# EAGLE board Part 1 – Build the Minimized Circuit_ y = a'bd' + bc + bd' (EAGLE 9.7.0)

Size 148.5 x 126.87 mm. Coordinates in mm from the lower left corner, seen from the top.
Outline: 0,0 148.5,0 148.5,126.87 0,126.87 0,0
Copper layers (1*16): Top 0.035mm / dielectric 1.5mm / Bottom 0.035mm
Design rules "default": minimum track width 6mil, minimum drill 0.35mm, track to track 6mil, track to pad 6mil, pad to pad 6mil, via to via 6mil, smd to smd 6mil, copper to edge 40mil, drill to drill 6mil, minimum pad ring 10mil, minimum via ring 8mil, stop-mask expansion 4mil, vias tented up to drill 0mil, thermal gap 10mil

## Footprints (pad centres in the part's own frame; a part is rotated, then mirrored left to right if it is on the bottom)
LEDRD254W60D565H860B = drill 0.981 pad 1.581: 1 -1.27,0; 2 1.27,0
BATTERY-GENERIC = drill 1.118 pad 3.15 octagon: + 2.54,0; - -2.54,0
RESAD1016W63L850D250B = drill 0.83 pad 1.43: 1 -5.08,0; 2 5.08,0
SWITCH-SPDT-PTH-8.5X3.7MM = drill 1.016 pad 1.88: 1 -2.54,0; 2 0,0; 3 2.54,0
DIP762W53P254L1969H508Q14B = drill 0.743 pad 1.343: 1 -3.81,7.62; 2 -3.81,5.08; 3 -3.81,2.54; 4 -3.81,0; 5 -3.81,-2.54; 6 -3.81,-5.08; 7 -3.81,-7.62; 8 3.81,-7.62; 9 3.81,-5.08; 10 3.81,-2.54; 11 3.81,0; 12 3.81,2.54; 13 3.81,5.08; 14 3.81,7.62

## Placement (x,y rotation side)
D1  RED  [LEDRD254W60D565H860B]  76.22,21.67 180 top
P1  BATTERYGENERIC  [BATTERY-GENERIC]  8.26,118.61 180 top
R1  220  [RESAD1016W63L850D250B]  74.95,8.97 90 top
S1  TOGGLE  [SWITCH-SPDT-PTH-8.5X3.7MM]  13.99,19.13 0 top
S3  TOGGLE  [SWITCH-SPDT-PTH-8.5X3.7MM]  102.89,19.13 0 top
S5  TOGGLE  [SWITCH-SPDT-PTH-8.5X3.7MM]  54.63,19.13 0 top
S7  TOGGLE  [SWITCH-SPDT-PTH-8.5X3.7MM]  138.45,19.13 0 top
U1  74HC04_PDIP  [DIP762W53P254L1969H508Q14B]  29.44,84.65 90 top
U2  74HC08_PDIP  [DIP762W53P254L1969H508Q14B]  80.24,84.65 90 top
U3  74HC32_PDIP  [DIP762W53P254L1969H508Q14B]  133.58,84.65 90 top

## Library data of the parts
D1 = Tinkercad; CATEGORY: Opto-Electronic; SUB-CATEGORY: LED; VALUE: LED_RED
P1 R1 S1 S3 S5 S7 U1-U3 = Tinkercad

## Nets
D1_C: D1.2 R1.2
P1+: P1.+ S1.3 S3.3 S5.3 S7.3 U1.14 U2.14 U3.14
P1-: P1.- R1.1 S1.1 S3.1 S5.1 S7.1 U1.7 U2.7 U3.7
U1_1A: S1.2 U1.1
U1_1Y: U1.2 U2.1
U1_2A: S7.2 U1.3 U2.9
U1_2Y: U1.4 U2.5
U1_3Y: U1.6 U2.10
U2_1Y: U2.3 U3.1
U2_2A: S5.2 U1.5 U2.4 U2.13
U2_2Y: U2.2 U2.6
U2_3Y: U2.8 U3.5
U2_4A: S3.2 U2.12
U2_4Y: U2.11 U3.2
U3_1Y: U3.3 U3.4
U3_2Y: D1.1 U3.6

## Tracks (layer width: path | path; a pad name or v marks a point on that pad's centre or on a via)
D1_C  (1 unrouted)
P1+  (7 unrouted)
P1-  (8 unrouted)
U1_1A  (1 unrouted)
U1_1Y  (1 unrouted)
U1_2A  (2 unrouted)
U1_2Y  (1 unrouted)
U1_3Y  (1 unrouted)
U2_1Y  (1 unrouted)
U2_2A  (3 unrouted)
U2_2Y  (1 unrouted)
U2_3Y  (1 unrouted)
U2_4A  (1 unrouted)
U2_4Y  (1 unrouted)
U3_1Y  (1 unrouted)
U3_2Y  (1 unrouted)